# Altium PCB Eurocircuits4L.PcbDoc
Units mm, origin at the board's own origin, x right, y up, seen from the top; angles counter-clockwise.
Board outline 245.1 x 203.6 mm, 4 copper layers (Top Layer, Internal Plane 1, Internal Plane 2, Bottom Layer), stack 1.57 mm thick; 131 components, 89 nets, 447 pads, 91 vias.
Unrouted connection lines stored in the file: 4.
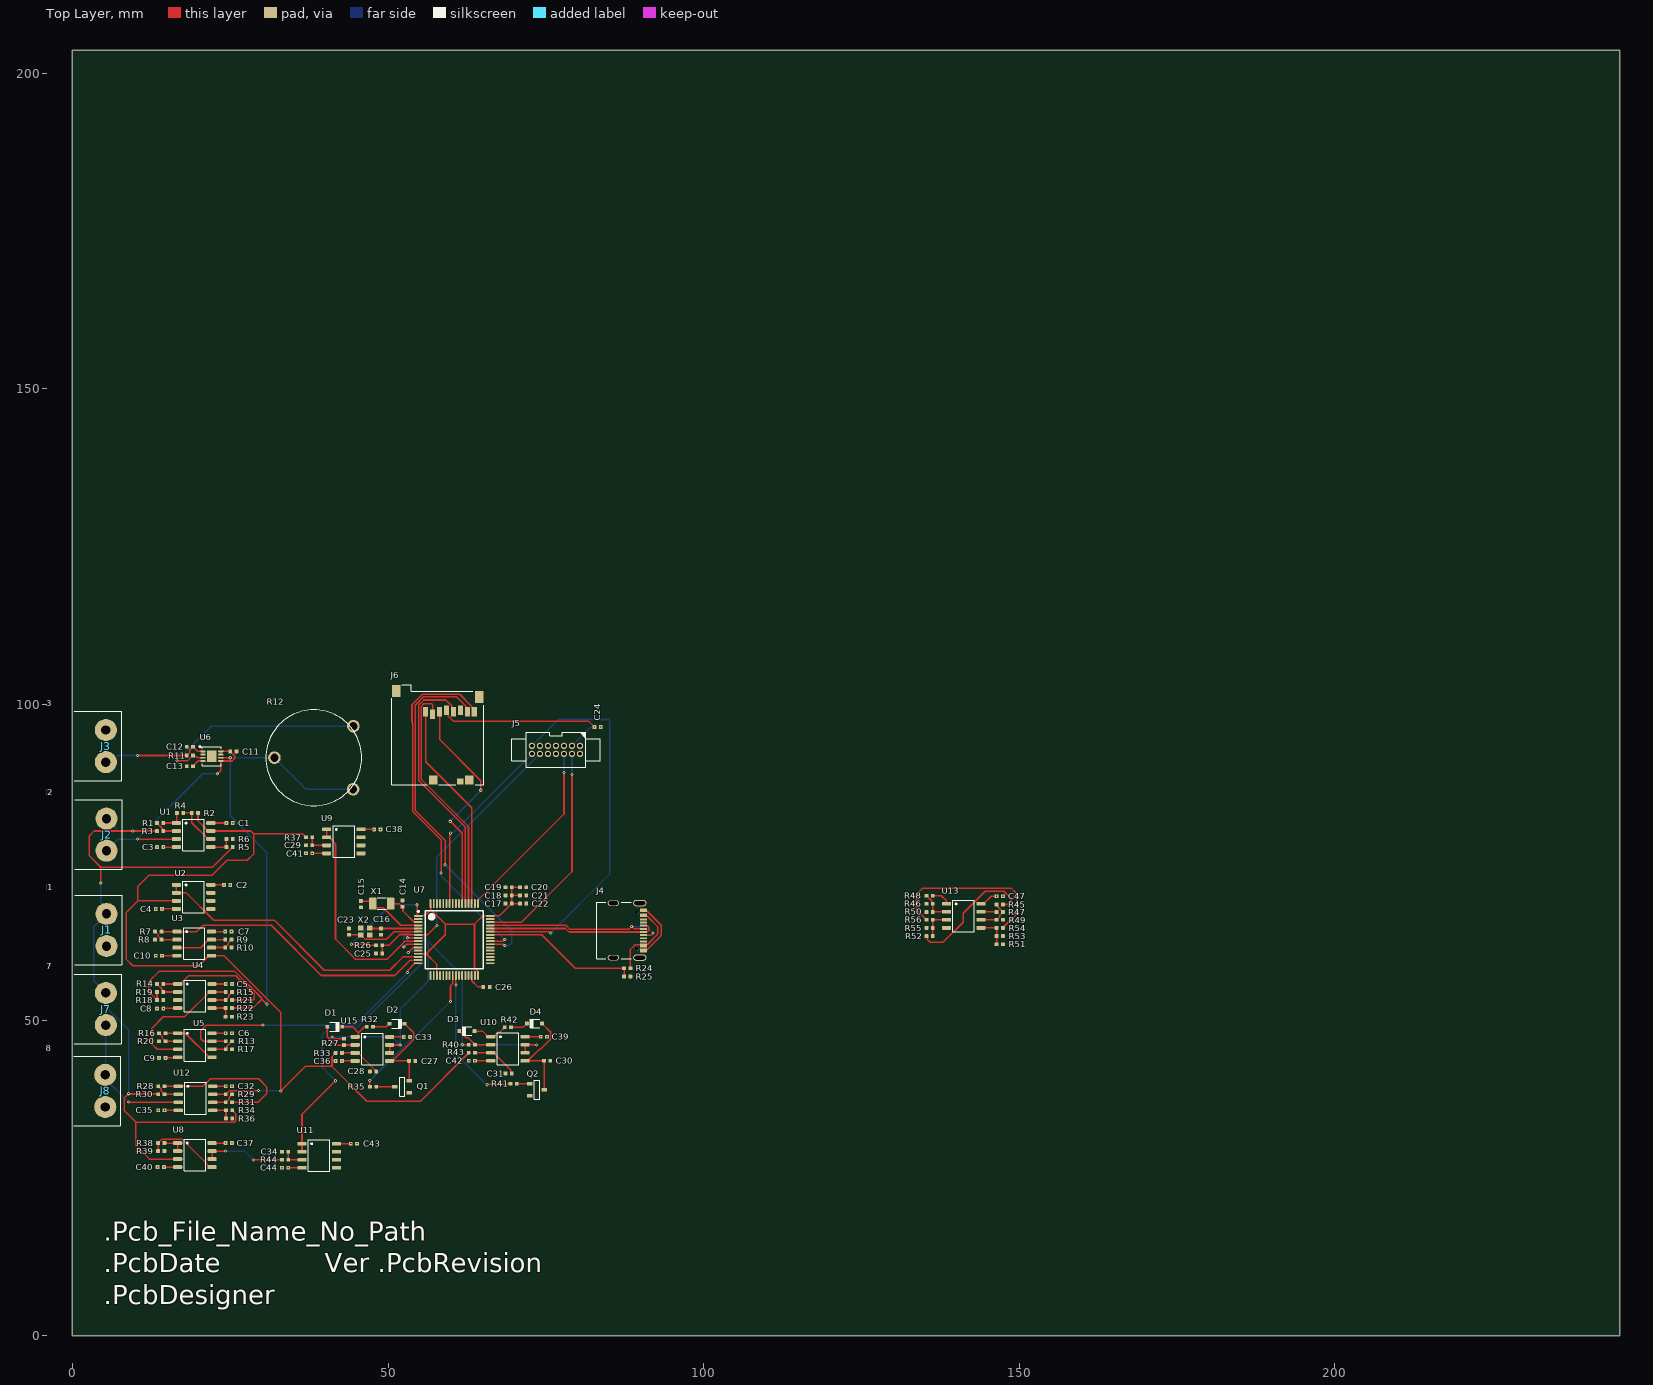
[diagram p0: Top Layer view]
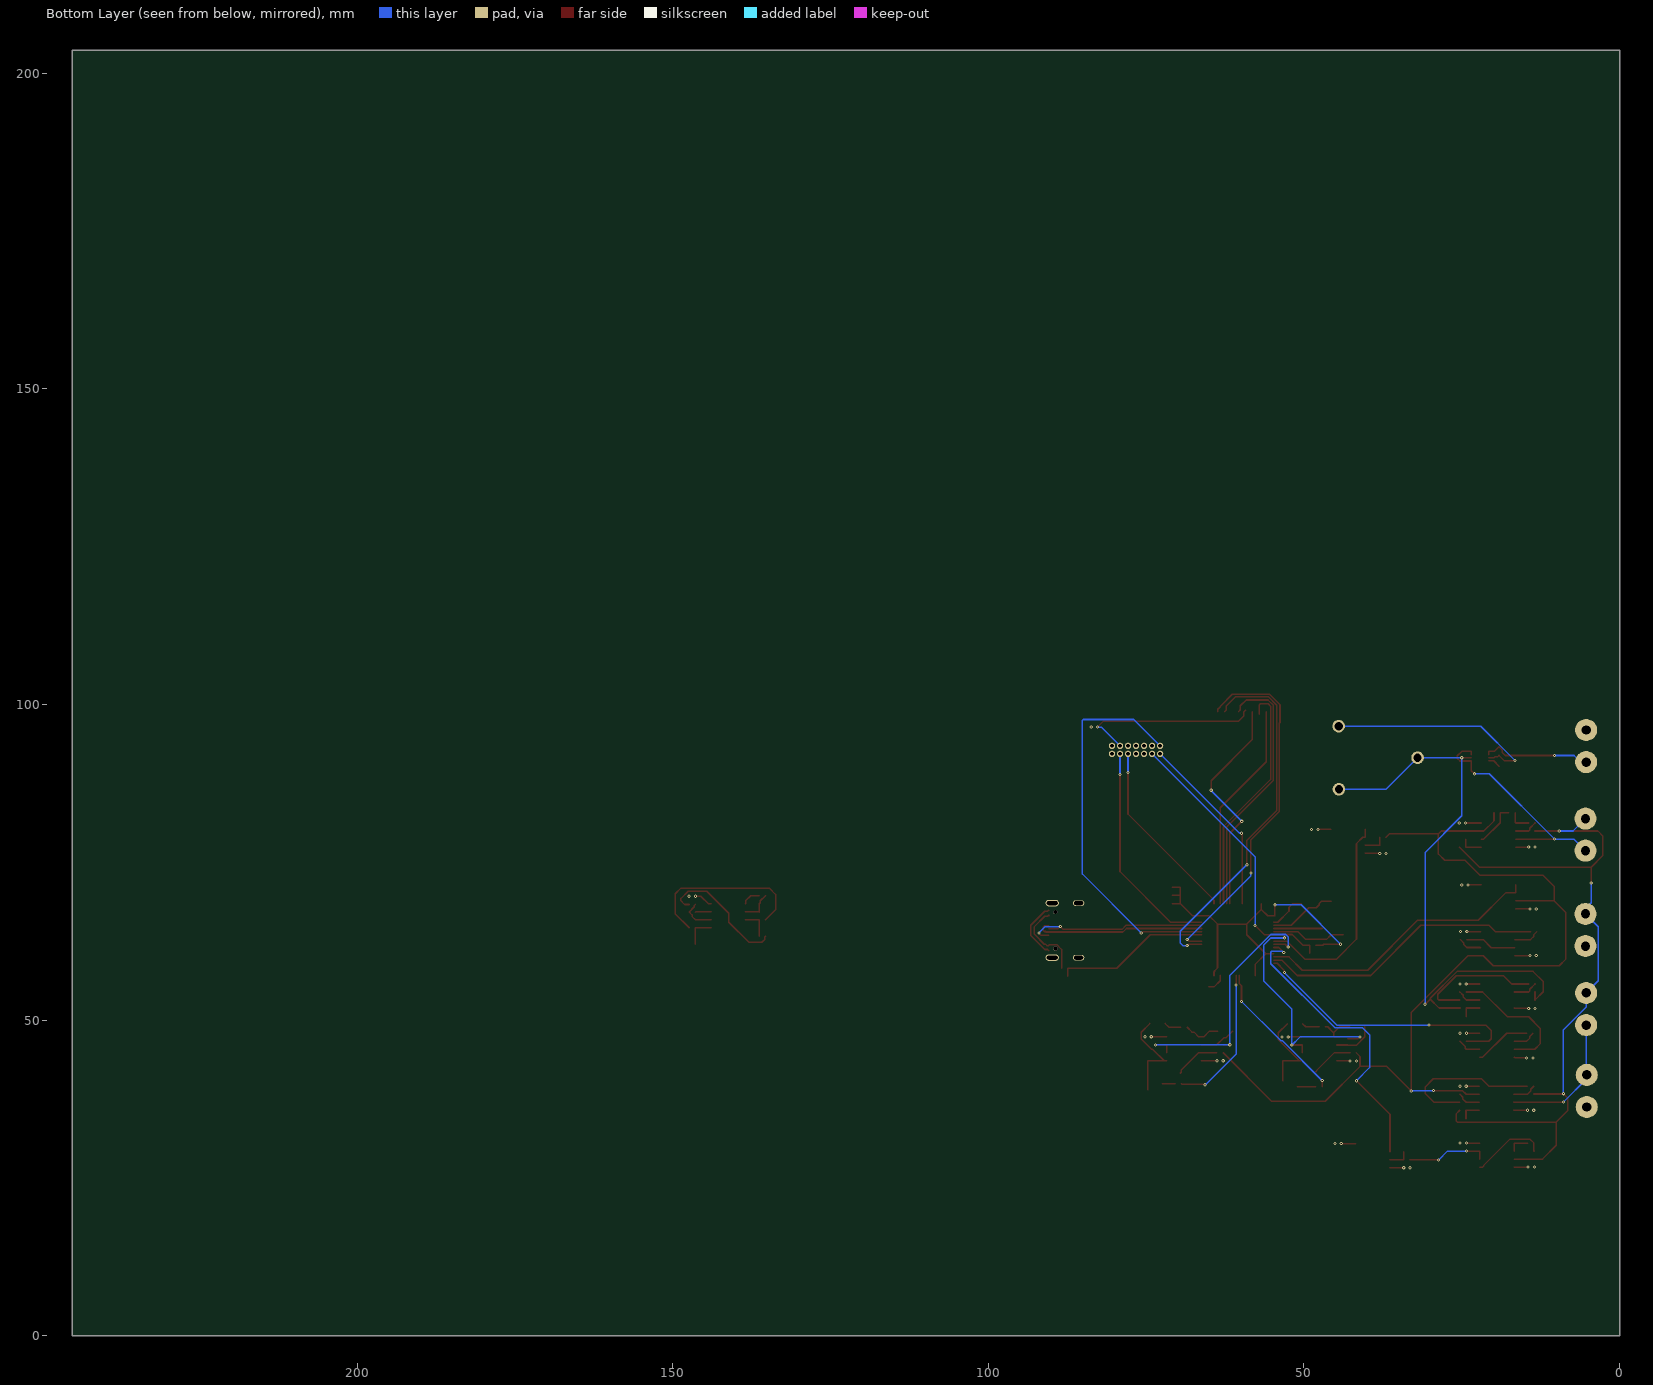
[diagram p1: Bottom Layer view, seen from below]
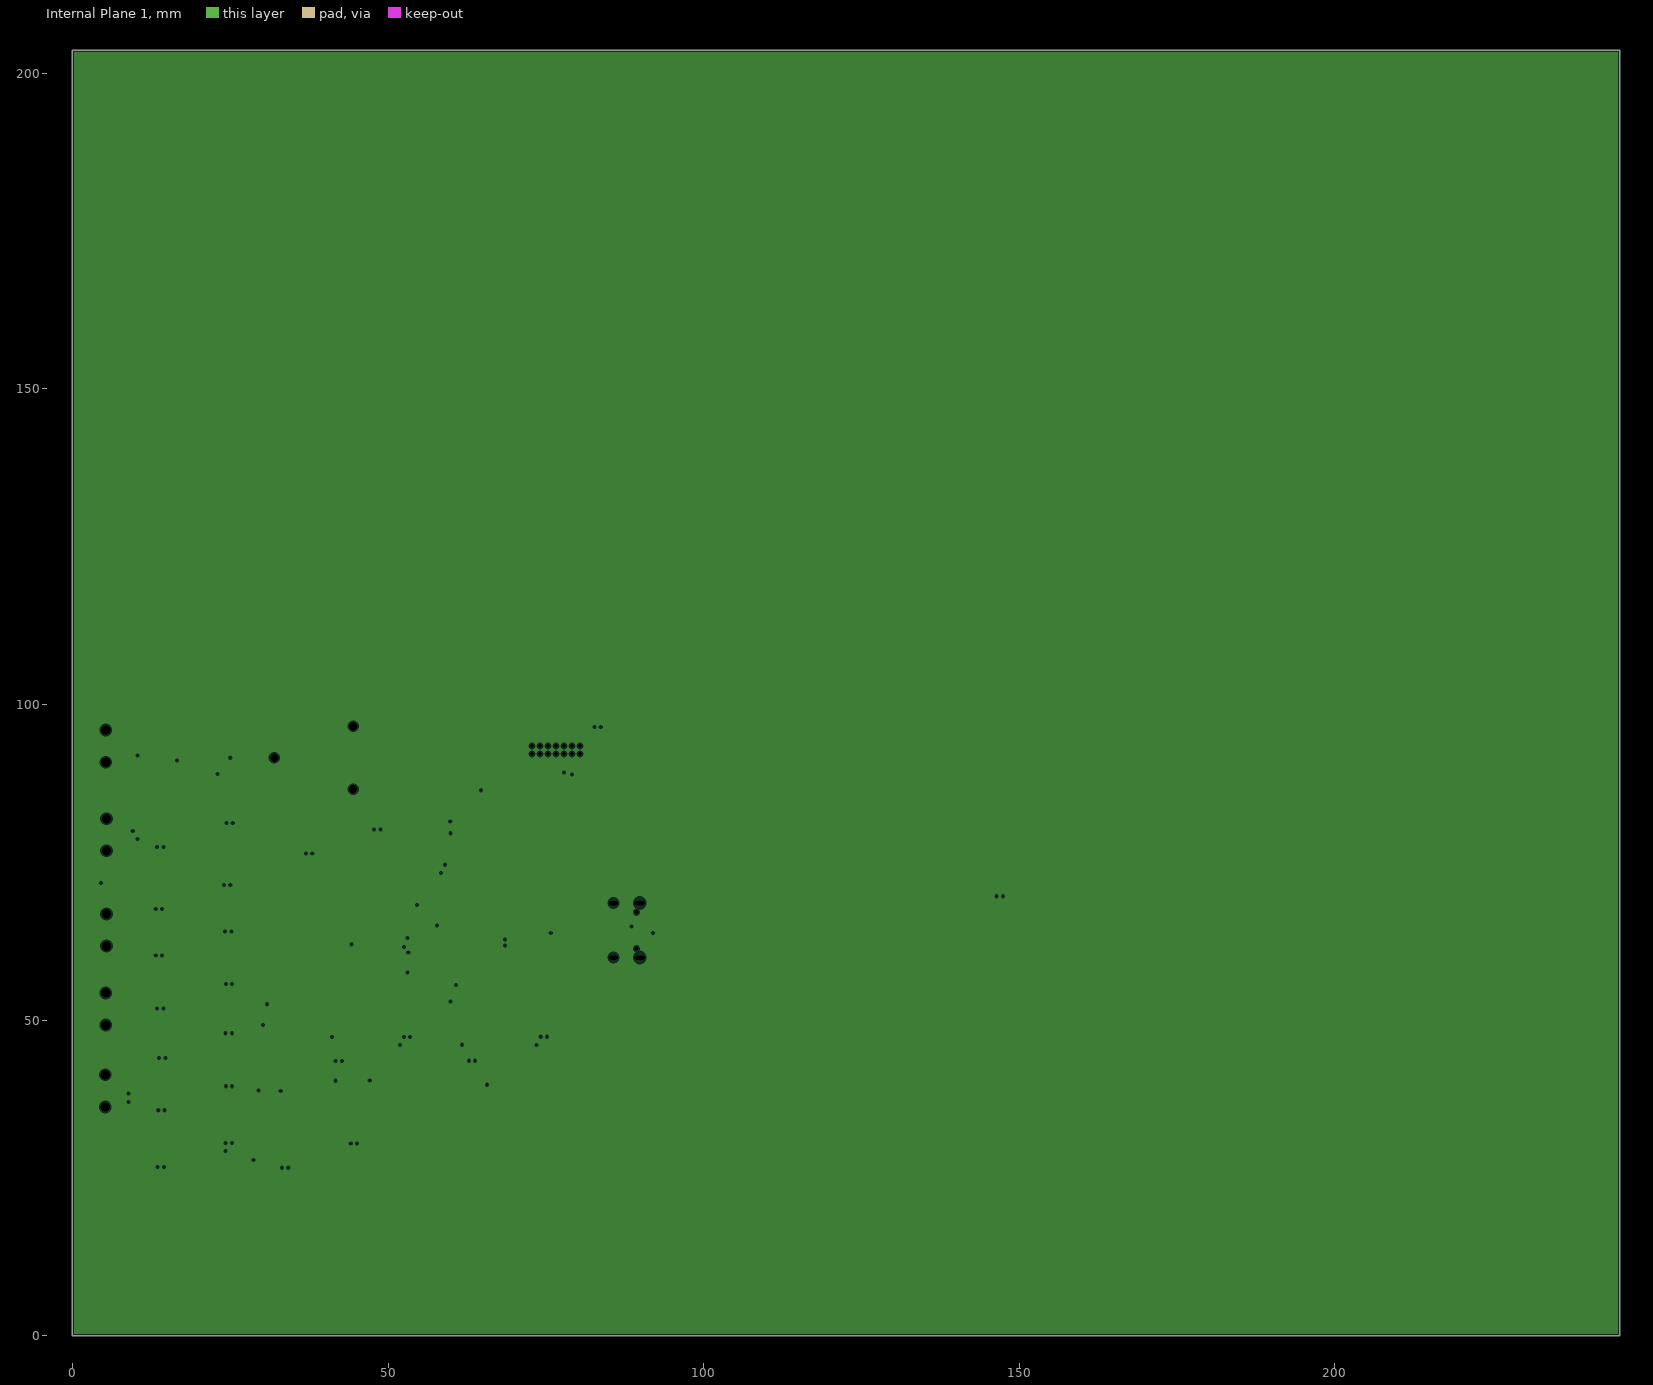
[diagram p2: Internal Plane 1, clearances drawn from the general rule]
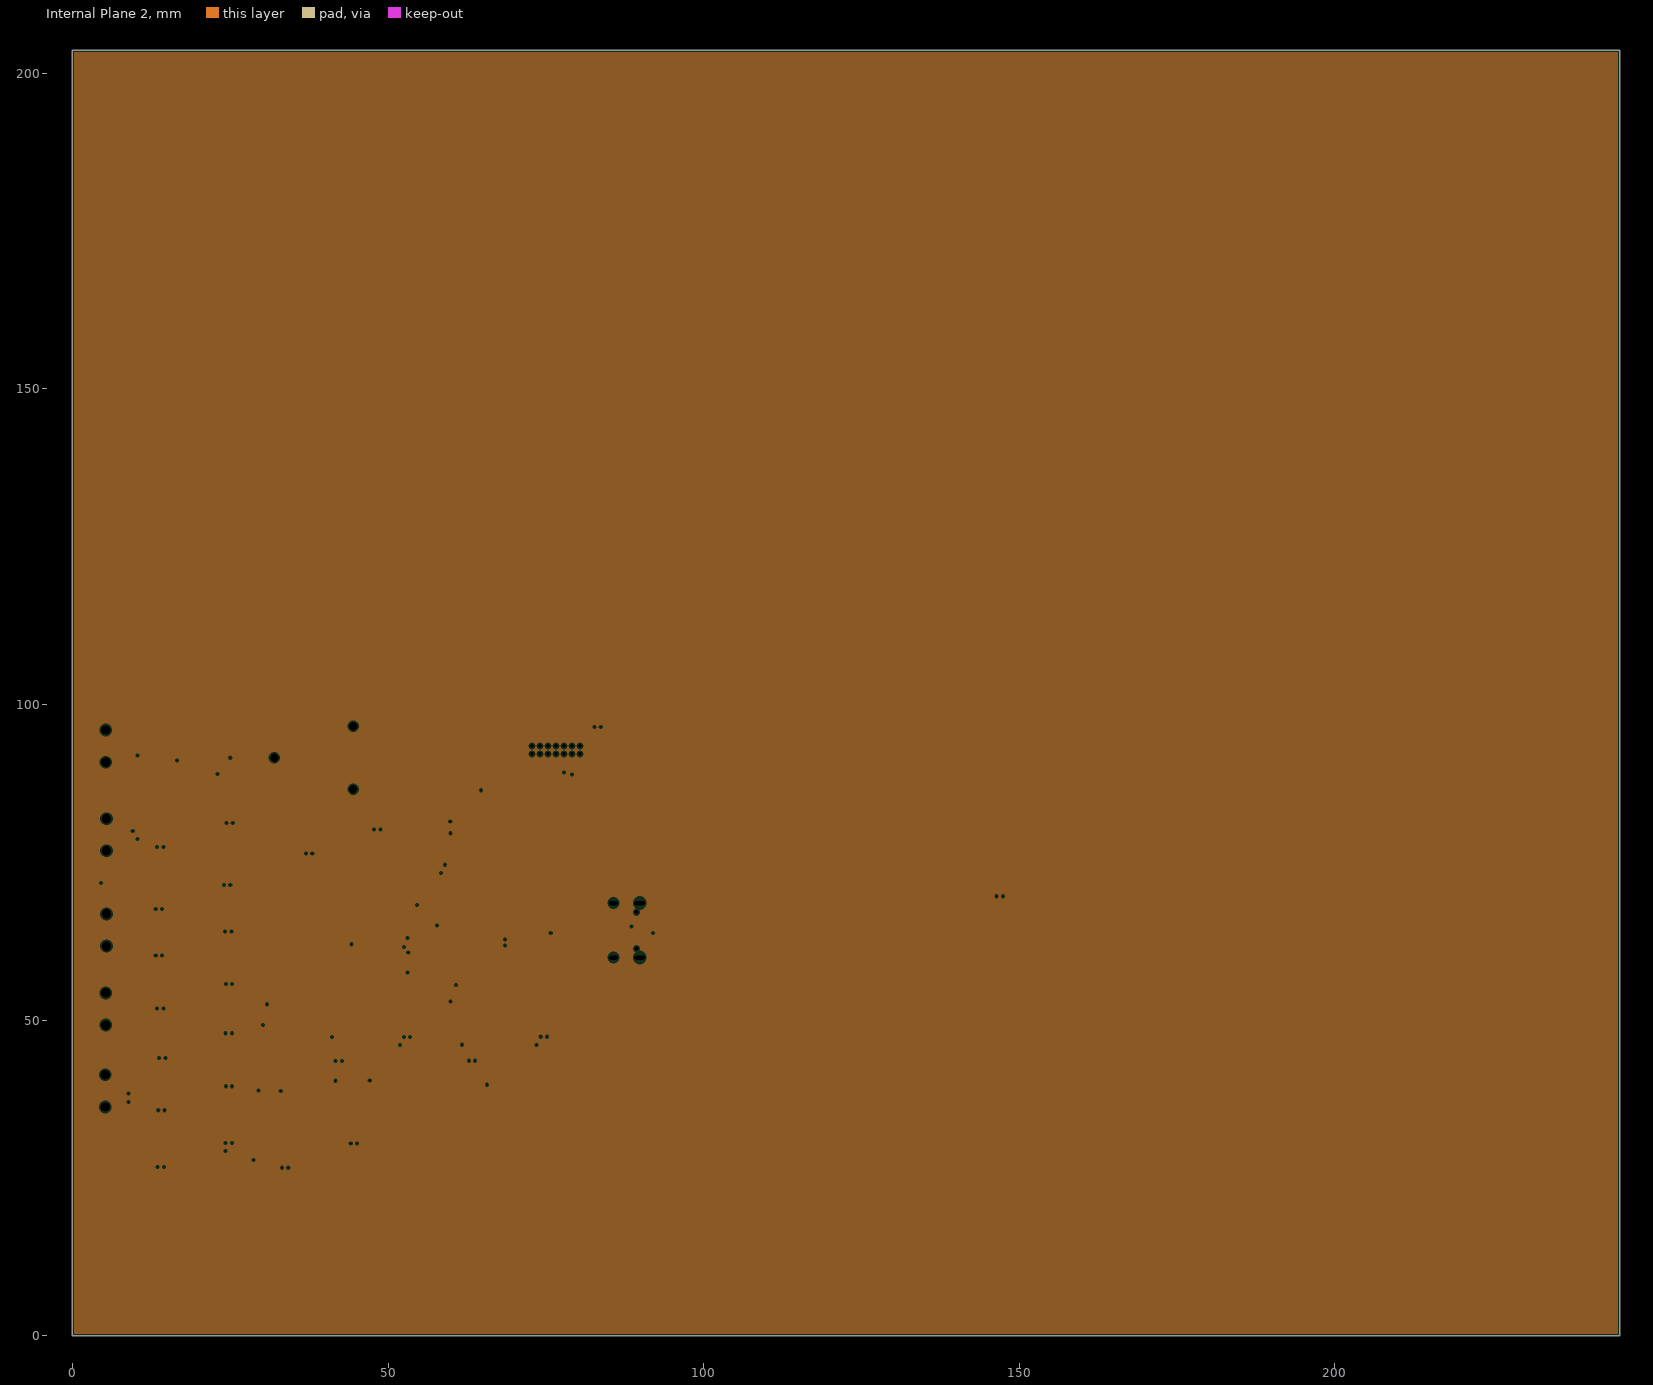
[diagram p3: Internal Plane 2, clearances drawn from the general rule]
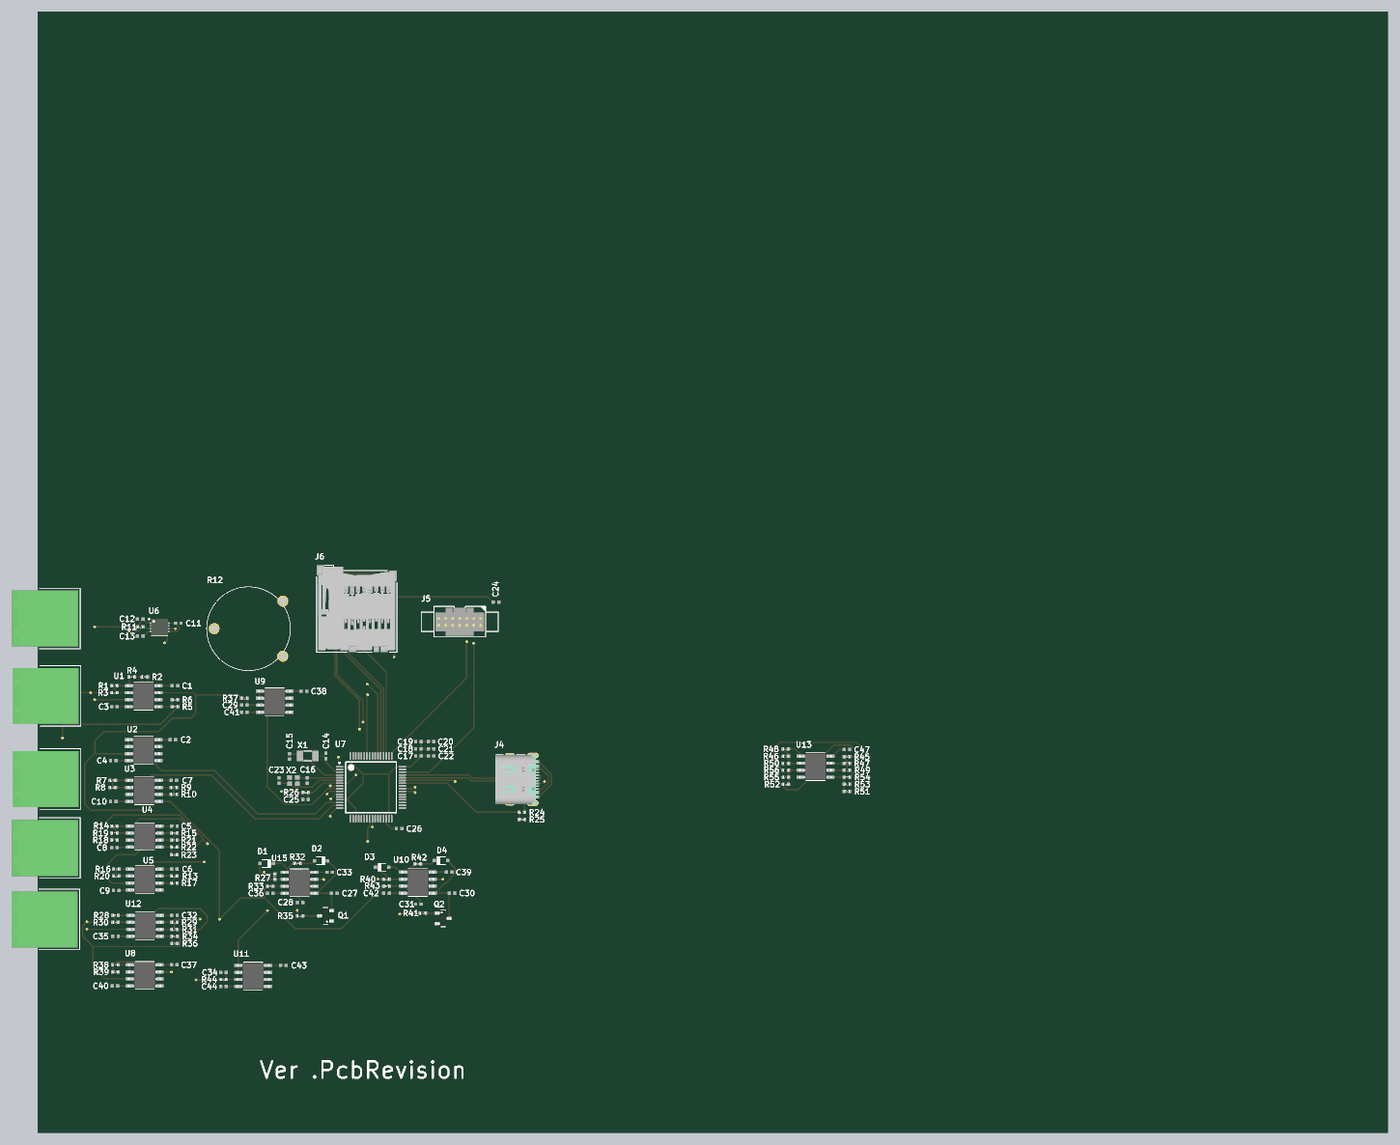
[diagram p4: 3D render of the assembled board from above, using the file's embedded part models]

## Layer stack, top to bottom
Top Solder: solder mask 0.01, Solder Resist, Dk 3.5
Top Layer: signal copper 0.035
Dielectric 1: prepreg 0.36, PR7826, Dk 4.32
Internal Plane 1: plane copper 0.035
Dielectric 3: core 0.71, FR-4, Dk 4.2
Internal Plane 2: plane copper 0.035
Dielectric 2: prepreg 0.36, PR7826, Dk 4.32
Bottom Layer: signal copper 0.035
Bottom Solder: solder mask 0.01, Solder Resist, Dk 3.5

## Board outline
0,0 0,203.6 245.1,203.6 245.1,0

## Design rules (kind name [scope] priority, off if disabled: settings)
AcuteAngle [All] p1 off: minimum=9.00000000000000E+0001 checktracksonly=TRUE
AssemblyTestPointUsage [All] p1 off:
AssemblyTestpoint [All] p1 off: testpointundercomponent=TRUE minsize=1.016 maxsize=2.54 preferedsize=1.524 minholesize=0 maxholesize=1.016 preferedholesize=0.813 testpointgrid=0.025 usegrid=TRUE gridtolerance=0 allowsidetop=TRUE allowsidebottom=TRUE
BoardOutlineClearance [All] p1 off: gap=0.25 ignorepadtopadclearanceinfootprint=FALSE
Clearance [All] p1: gap=0.15 ignorepadtopadclearanceinfootprint=FALSE except(0: Arc-Hole Track-Hole SMDPad-Hole THPad-Hole Via-Hole Fill-Hole Poly-Hole Region-Hole Text-Hole)
ComponentClearance [All] p1 off: gap=0.25 collisioncheckmode=3 verticalgap=0.25 showdistances=FALSE
DiffPairsRouting [All] p1 off: maxlimit=0.254 minlimit=0.254 mostfreqgap=0.254 toplayer_minwidth=0.381 toplayer_maxwidth=0.381 toplayer_prefwidth=0.381 bottomlayer_minwidth=0.381 bottomlayer_maxwidth=0.381 bottomlayer_prefwidth=0.381 maxuncoupledlength=12.7
FabricationTestPointUsage [All] p1 off: valid=0 allowmultiple=FALSE
FabricationTestpoint [All] p1 off: side=3 testpointundercomponent=TRUE minsize=1.016 maxsize=2.54 preferedsize=1.524 minholesize=0 maxholesize=1.016 preferedholesize=0.813 testpointgrid=0.025 allowsidetop=TRUE allowsidebottom=TRUE usegrid=TRUE gridtolerance=0
FanoutControl Fanout_BGA [IsBGA] p1 off: bgadir=Out bgaviamode=Centered fanoutstyle=Auto fanoutdirection=Alternating viagrid=0.025 // Fanout_BGA (Default Rule)
FanoutControl Fanout_LCC [IsLCC] p2 off: bgadir=Out bgaviamode=Centered fanoutstyle=Auto fanoutdirection=Alternating viagrid=0.025 // Fanout_LCC (Default Rule)
FanoutControl Fanout_SOIC [IsSOIC] p3 off: bgadir=Out bgaviamode=Centered fanoutstyle=Auto fanoutdirection=Alternating viagrid=0.025 // Fanout_SOIC (Default Rule)
FanoutControl Fanout_Small [(CompPinCount < 5)] p4 off: bgadir=Out bgaviamode=Centered fanoutstyle=Auto fanoutdirection=OutThenIn viagrid=0.025 // Fanout_Small (Default Rule)
FanoutControl Fanout_Default [All] p5 off: bgadir=Out bgaviamode=Centered fanoutstyle=Auto fanoutdirection=Alternating viagrid=0.025 // Fanout_Default (Default Rule)
Height [All] p1 off: minheight=0 maxheight=25.4 prefheight=12.7
HoleSize [All] p1: absolutevalues=TRUE maxlimit=5 minlimit=0.15 maxpercent=80.000 minpercent=20.000
HoleToHoleClearance [All] p1 off: gap=0.25 allowstackedmicrovias=TRUE
LayerPairs [All] p1 off: enforce=TRUE
MinimumAnnularRing [All] p1 off: minimumring=0.175
MinimumSolderMaskSliver [All] p1 off: minsoldermaskwidth=0
NetAntennae [All] p1 off: netantennaetolerance=0
PasteMaskExpansion [All] p1 off: expansion=0
PlaneClearance [All] p1: clearance=0.25
PlaneConnect [All] p1: planeconnectstyle=Direct reliefexpansion=0.5 reliefentries=4 reliefconductorwidth=0.25 reliefairgap=0.25
PolygonConnect [All] p1: connectstyle=Direct reliefconductorwidth=0.25 reliefentries=4 polygonreliefangle="90 Angle" airgapwidth=0.25
RoutingCorners [All] p1 off: cornerstyle=45-Degree minsetback=2.5 maxsetback=2.5
RoutingLayers [All] p1 off: top layer_v5=TRUE bottom layer_v5=TRUE
RoutingPriority [All] p1 off: routingpriority=0
RoutingTopology [All] p1 off: topology=Shortest
RoutingVias [All] p1: holewidth=0.25 width=0.6 viastyle="Through Hole" minholewidth=0.15 minwidth=0.5 maxholewidth=0.9 maxwidth=1.5 useviatemplates=TRUE viatemplateguid#1={6E875701-A1CC-42E3-88A2-D4F7C724CCEE} viatemplatename#1=v50h15m0mx0
SilkToBoardRegionClearance [All] p1 off:
SilkToSilkClearance [All] p1 off: silktosilkclearance=0
SilkToSolderMaskClearance [IsPad] p1 off: minsilkscreentomaskgap=0 clearancetoexposedcopper=TRUE
SolderMaskExpansion [All] p1: expansion=0 istentingtop=FALSE
Width [All] p1: maxlimit=4 minlimit=0.15 preferedwidth=0.25
3 further rules are at their usual default settings.

## Classes and differential pairs
component class Batterie: C47 R45 R46 R47 R48 R49 R50 R51 R52 R53 R54 R55 R56 U13
component class PROC: C14 C15 C16 C17 C18 C19 C20 C21 C22 C23 C24 C25 C26 J4 J5 J6 R24 R25 R26 U7 X1 X2
component class SLOW: C27 C28 C29 C30 C31 C32 C33 C34 C35 C36 C37 C38 C39 C40 C41 C42 C47 D1 D2 D3 D4 J7 J8 Q1 Q2 R27 R28 R29 R30 R31 R32 R33 R34 R35 R36 R37 R38 R39 R40 R41 R42 R43 R44 U8 U9 U10 U11 U12 U15
component class FAST: C1 C2 C3 C4 C5 C6 C7 C8 C9 C10 C11 C12 C13 J1 J2 J3 R1 R2 R3 R4 R5 R6 R7 R8 R9 R10 R11 R12 R13 R14 R15 R16 R17 R18 R19 R20 R21 R22 R23 U1 U2 U3 U4 U5 U6

## Components (designator, comment, footprint, x,y, rotation, side; value= is the part's Value field where it differs from the comment)
C1 "1u" "CAPACITOR 1005 REFLOW" 24.9,81.205 r0 top
C2 "1u" "CAPACITOR 1005 REFLOW" 24.5,71.405 r0 top
C3 "1u" "CAPACITOR 1005 REFLOW" 13.9,77.395 r0 top
C4 "1u" "CAPACITOR 1005 REFLOW" 13.7,67.595 r0 top
C5 "1u" "CAPACITOR 1005 REFLOW" 24.8,55.705 r0 top
C6 "1u" "CAPACITOR 1005 REFLOW" 24.776,47.905 r0 top
C7 "1u" "CAPACITOR 1005 REFLOW" 24.7,64 r0 top
C8 "1u" "CAPACITOR 1005 REFLOW" 13.9,51.8 r0 top
C9 "1u" "CAPACITOR 1005 REFLOW" 14.23,44 r0 top
C10 "1u" "CAPACITOR 1005 REFLOW" 13.7,60.195 r0 top
C11 "4.7u" "CAPACITOR 1005 REFLOW" 25.5,92.55 r0 top
C12 "4.7u" "CAPACITOR 1005 REFLOW" 18.6,93.3 r180 top
C13 "1n" "CAPACITOR 1005 REFLOW" 18.6,90.2 r180 top
C14 "18p" "CAPACITOR 1005 REFLOW" 52.298,68.445 r270 top
C15 "18p" "CAPACITOR 1005 REFLOW" 45.698,68.345 r90 top
C16 "18p" "CAPACITOR 1005 REFLOW" 48.898,63.995 r90 top
C17 "100n" "CAPACITOR 1005 REFLOW" 69.098,68.445 r180 top
C18 "100n" "CAPACITOR 1005 REFLOW" 69.098,69.745 r180 top
C19 "100n" "CAPACITOR 1005 REFLOW" 69.098,71.045 r180 top
C20 "100n" "CAPACITOR 1005 REFLOW" 71.398,71.045 r0 top
C21 "100n" "CAPACITOR 1005 REFLOW" 71.398,69.745 r0 top
C22 "100n" "CAPACITOR 1005 REFLOW" 71.398,68.445 r0 top
C23 "18p" "CAPACITOR 1005 REFLOW" 43.798,63.995 r90 top
C24 "100n" "CAPACITOR 1005 REFLOW" 83.2,96.4 r0 top
C25 "18p" "CAPACITOR 1005 REFLOW" 48.598,60.545 r180 top
C26 "100n" "CAPACITOR 1005 REFLOW" 65.598,55.245 r0 top
C27 "4.7u" "CAPACITOR 1005 REFLOW" 53.822,43.515 r0 top
C28 "33n" "CAPACITOR 1005 REFLOW" 47.623,41.82 r180 top
C29 "3,3u" "CAPACITOR 1005 REFLOW" 37.5,77.7 r180 top
C30 "4.7u" "CAPACITOR 1005 REFLOW" 75.198,43.54 r0 top
C31 "33n" "CAPACITOR 1005 REFLOW" 69.098,41.545 r180 top
C32 "1u" "CAPACITOR 1005 REFLOW" 24.8,39.505 r0 top
C33 "1u" "CAPACITOR 1005 REFLOW" 52.998,47.325 r0 top
C34 "3,3u" "CAPACITOR 1005 REFLOW" 33.7,29.14 r180 top
C35 "1u" "CAPACITOR 1005 REFLOW" 14.1,35.7 r0 top
C36 "1u" "CAPACITOR 1005 REFLOW" 42.195,43.515 r0 top
C37 "1u" "CAPACITOR 1005 REFLOW" 24.771,30.505 r0 top
C38 "1u" "CAPACITOR 1005 REFLOW" 48.3,80.2 r0 top
C39 "1u" "CAPACITOR 1005 REFLOW" 74.698,47.35 r0 top
C40 "1u" "CAPACITOR 1005 REFLOW" 14,26.7 r0 top
C41 "1u" "CAPACITOR 1005 REFLOW" 37.5,76.4 r0 top
C42 "1u" "CAPACITOR 1005 REFLOW" 63.298,43.54 r0 top
C43 "1u" "CAPACITOR 1005 REFLOW" 44.6,30.41 r0 top
C44 "1u" "CAPACITOR 1005 REFLOW" 33.7,26.6 r0 top
C47 "1u" "CAPACITOR 1005 REFLOW" 146.9,69.6 r0 top
D1 "*" "DIODE SOD323 REFLOW" 41.563,48.92 r180 top
D2 "*" "DIODE SOD323 REFLOW" 51.423,49.42 r180 top
D3 "*" "DIODE SOD323 REFLOW" 62.498,48.245 r0 top
D4 "*" "DIODE SOD323 REFLOW" 73.198,49.445 r0 top
J1 "*" "WE 691312510002" 5.4,64.26 r90 top
J2 "*" "WE 691312510002" 5.4,79.36 r90 top
J3 "*" "WE 691312510002" 5.3,93.4 r90 top
J4 "12402012E212A" "USB-C-SMD Amphenol 12402012E212A" 85.7,64.196 r270 top
J5 "STlink-14pin-1.27mm" FTSH-107-01-S-D-K 76.6,92.799 r180 top
J6 "47352-1001" "SD MICRO MOLEX 47352-1001" 57.9,95.2 r180 top
J7 "*" "WE 691312510002" 5.3,51.74 r90 top
J8 "*" "WE 691312510002" 5.2,38.76 r90 top
Q1 "*" "SOT23 P0.95 C1.6x3.0 H1.3" 52.223,39.42 r180 top
Q2 "*" "SOT23 P0.95 C1.6x3.0 H1.3" 73.598,38.945 r0 top
R1 "20k" "RESISTOR 1005 REFLOW" 13.9,81.205 r0 top
R2 "10k" "RESISTOR 1005 REFLOW" 19.4,82.8 r0 top
R3 "10k" "RESISTOR 1005 REFLOW" 13.9,79.935 r0 top
R4 "10k" "RESISTOR 1005 REFLOW" 17.054,82.8 r0 top
R5 "10k" "RESISTOR 1005 REFLOW" 24.9,77.395 r180 top
R6 "10k" "RESISTOR 1005 REFLOW" 24.9,78.665 r180 top
R7 "100k" "RESISTOR 1005 REFLOW" 13.6,64.005 r0 top
R8 "10k" "RESISTOR 1005 REFLOW" 13.6,62.735 r0 top
R9 "100k" "RESISTOR 1005 REFLOW" 24.7,62.735 r180 top
R10 "10k" "RESISTOR 1005 REFLOW" 24.7,61.5 r180 top
R11 "10k" "RESISTOR 1005 REFLOW" 18.6,91.9 r180 top
R12 "*" "Trimmer PIHER PT15" 38.25,91.55 r90 top
R13 "100k" "RESISTOR 1005 REFLOW" 24.776,46.635 r0 top
R14 "20k" "RESISTOR 1005 REFLOW" 13.9,55.705 r180 top
R15 "10k" "RESISTOR 1005 REFLOW" 24.8,54.435 r0 top
R16 "100k" "RESISTOR 1005 REFLOW" 14.23,47.905 r180 top
R17 "10k" "RESISTOR 1005 REFLOW" 24.776,45.365 r0 top
R18 "2" "RESISTOR 1005 REFLOW" 13.9,53.165 r180 top
R19 "10k" "RESISTOR 1005 REFLOW" 13.9,54.435 r180 top
R20 "10k" "RESISTOR 1005 REFLOW" 14.23,46.635 r180 top
R21 "10k" "RESISTOR 1005 REFLOW" 24.8,53.165 r0 top
R22 "10k" "RESISTOR 1005 REFLOW" 24.771,51.895 r0 top
R23 "10k" "RESISTOR 1005 REFLOW" 24.771,50.5 r0 top
R24 "22k" "RESISTOR 1005 REFLOW" 87.9,58.2 r180 top
R25 "33k" "RESISTOR 1005 REFLOW" 87.9,56.9 r180 top
R26 "22k" "RESISTOR 1005 REFLOW" 48.598,61.845 r180 top
R27 "10k" "RESISTOR 1005 REFLOW" 43.023,46.52 r270 top
R28 "150k" "RESISTOR 1005 REFLOW" 14.1,39.505 r0 top
R29 "110k" "RESISTOR 1005 REFLOW" 24.8,38.235 r180 top
R30 "12k" "RESISTOR 1005 REFLOW" 14.1,38.235 r0 top
R31 "10k" "RESISTOR 1005 REFLOW" 24.8,36.965 r180 top
R32 "100" "RESISTOR 1005 REFLOW" 47.123,48.92 r180 top
R33 "10k" "RESISTOR 1005 REFLOW" 42.195,44.785 r180 top
R34 "10k" "RESISTOR 1005 REFLOW" 24.829,35.695 r180 top
R35 "1k" "RESISTOR 1005 REFLOW" 47.623,39.42 r180 top
R36 "110k" "RESISTOR 1005 REFLOW" 24.829,34.4 r180 top
R37 "33k" "RESISTOR 1005 REFLOW" 37.5,78.935 r180 top
R38 "33k" "RESISTOR 1005 REFLOW" 14.071,30.505 r180 top
R39 "82k" "RESISTOR 1005 REFLOW" 14.071,29.235 r180 top
R40 "10k" "RESISTOR 1005 REFLOW" 63.298,46.08 r0 top
R41 "1k" "RESISTOR 1005 REFLOW" 69.898,39.895 r0 top
R42 "100" "RESISTOR 1005 REFLOW" 68.998,48.845 r180 top
R43 "10k" "RESISTOR 1005 REFLOW" 63.298,44.81 r180 top
R44 "33k" "RESISTOR 1005 REFLOW" 33.7,27.87 r180 top
R45 "1M" "RESISTOR 1005 REFLOW" 146.9,68.3 r0 top
R46 "100k" "RESISTOR 1005 REFLOW" 135.8,68.405 r180 top
R47 "9,1M" "RESISTOR 1005 REFLOW" 146.9,67.1 r0 top
R48 "910k" "RESISTOR 1005 REFLOW" 135.8,69.7 r180 top
R49 "649k" "RESISTOR 1005 REFLOW" 146.9,65.865 r180 top
R50 "41,2k" "RESISTOR 1005 REFLOW" 135.8,67.1 r0 top
R51 "1M" "RESISTOR 1005 REFLOW" 146.9,62 r0 top
R52 "100k" "RESISTOR 1005 REFLOW" 135.8,63.3 r180 top
R53 "5,76M" "RESISTOR 1005 REFLOW" 146.9,63.3 r180 top
R54 "680k" "RESISTOR 1005 REFLOW" 146.9,64.595 r180 top
R55 "93,1k" "RESISTOR 1005 REFLOW" 135.8,64.595 r0 top
R56 "82k" "RESISTOR 1005 REFLOW" 135.8,65.865 r0 top
U1 "*" "SO8 P1.27 C4.0X5.0 H1.75" 19.2,79.3 r0 top
U2 "*" "SO8 P1.27 C4.0X5.0 H1.75" 19.2,69.5 r0 top
U3 "*" "SO8 P1.27 C4.0X5.0 H1.75" 19.3,62.1 r0 top
U4 "*" "SO8 P1.27 C4.0X5.0 H1.75" 19.4,53.8 r0 top
U5 "*" "SO8 P1.27 C4.0X5.0 H1.75" 19.405,46 r0 top
U6 "ADM7170ACPZ-3.3-R7" "LFCSP8 P0.5 C3.0x2.8 H1.0" 22.1,91.8 r0 top
U7 "STM32U595RJT6" TSQFP50P1200X1200X160-64N 60.498,62.745 r0 top
U8 "*" "SO8 P1.27 C4.0X5.0 H1.75" 19.4,28.6 r0 top
U9 "*" "SO8 P1.27 C4.0X5.0 H1.75" 43,78.3 r0 top
U10 "*" "SO8 P1.27 C4.0X5.0 H1.75" 68.998,45.445 r0 top
U11 "*" "SO8 P1.27 C4.0X5.0 H1.75" 39.099,28.505 r0 top
U12 "*" "SO8 P1.27 C4.0X5.0 H1.75" 19.5,37.6 r0 top
U13 "*" "SO8 P1.27 C4.0X5.0 H1.75" 141.199,66.5 r0 top
U15 "*" "SO8 P1.27 C4.0X5.0 H1.75" 47.523,45.42 r0 top
X1 "*" "Crystal C3.2x1.5 Abracon ABS07" 48.998,68.445 r180 top
X2 "*" "Crystal C2.0x1.6 Kyocera CX2016DB" 46.398,63.995 r0 top

## Footprints (in the part's own frame and the unit in brackets; to place one, negate y for a bottom-side part, rotate by r counter-clockwise, add the part's x,y. Pads: shape width x height; smd on the part's side, far side on the other; paste and mask are expansions set on the pad)
"CAPACITOR 1005 REFLOW" [mm] "Capacitor SMD 1.0x0.5mm (0402-imperial)"
  rrect25% 0.6x0.6 smd: 1(-0.5,0) 2(0.5,0)
  body extent -0.5,-0.25 0.5,0.25, height 0.5
"Crystal C2.0x1.6 Kyocera CX2016DB" [mm] "Crystal C2.0x1.6 Kyocera CX2016DB, Height 0.4mm"
  rect 0.9x0.8 smd: 1(-0.7,-0.55) 2(0.7,-0.55) 3(0.7,0.55) 4(-0.7,0.55)
  body extent -1,-0.8 1,0.8, height 0.4
"Crystal C3.2x1.5 Abracon ABS07" [mm] "Crystal C3.2x1.5 Abracon ABS07"
  rrect25% 1.2x1.9 smd: 1(-1.4,0) 2(1.4,0)
  silkscreen extent -0.7,-0.9 0.7,0.9, body extent -1.6,-0.8 1.6,0.8, height 0.9
"DIODE SOD323 REFLOW" [mm] "DIODE SMD SOD323, 2-Leads, Body 1.8x1.40mm"
  rrect25% 0.6x0.6 smd: 1(-1.2,0) 2(1.2,0)
  silkscreen extent -0.78,-0.7 0.8,0.7, body extent -1.3,-0.7 1.3,0.7, height 1.21
FTSH-107-01-S-D-K [mm]
  round 1 hole 0.6: 1(-3.81,-0.635) 2(-3.81,0.635) 3(-2.54,-0.635) 4(-2.54,0.635) 5(-1.27,-0.635) 6(-1.27,0.635) 7(0,-0.635) 8(0,0.635) 9(1.27,-0.635) 10(1.27,0.635) 11(2.54,-0.635) 12(2.54,0.635) 13(3.81,-0.635) 14(3.81,0.635)
  silkscreen extent -7,-2.8 7,2.75, body extent -4.44,-2.54 4.45,2.54, height 5.71
"LFCSP8 P0.5 C3.0x2.8 H1.0" [mm] "LFCSP8"
  rect 1.5x1.8 smd: 0(0,0)
  rrect50% 0.8x0.3 smd: 1(-1.4,0.75) 2(-1.4,0.25) 3(-1.4,-0.25) 4(-1.4,-0.75) 5(1.4,-0.75) 6(1.4,-0.25) 7(1.4,0.25) 8(1.4,0.75)
  silkscreen extent -2,-1.5 1.5,1.6, body extent -1.5,-1.5 1.5,1.5, height 0.79
"RESISTOR 1005 REFLOW" [mm] "Resistor SMD 1.0x0.5mm (0402-imperial)"
  rrect25% 0.6x0.6 smd: 1(-0.5,0) 2(0.5,0)
  body extent -0.5,-0.25 0.5,0.25, height 0.35
"SD MICRO MOLEX 47352-1001" [mm] "SD MICRO MOLEX 47352-1001"
  rect 1.4x1.9 smd: 0(-6.55,-5.95) 0(6.6,-6.95)
  rect 1.3x1.4 smd: 0(-4.95,7.2) 0(0.75,7.2)
  rect 0.8x1.5 smd: 1(1.94,-3.66) 2(0.84,-3.26) 3(-0.26,-3.66) 4(-1.36,-3.86) 5(-2.46,-3.66) 6(-3.56,-3.86) 7(-4.66,-3.66) 8(-5.76,-3.66)
  rect 1x0.95 smd: 9(-3.56,7.425)
  silkscreen extent -7.3,-7.9 7.3,7.9, body extent -7.05,-7.64 7.05,7.56, height 1.89
"SO8 P1.27 C4.0X5.0 H1.75" [mm] "8-Pin Small Outline Integrated Circuit 1.27 mm Pitch, IPC Medium Density"
  rrect50% 1.45x0.6 smd: 1(-2.725,1.905) 2(-2.725,0.635) 3(-2.725,-0.635) 4(-2.725,-1.905) 5(2.725,-1.905) 6(2.725,-0.635) 7(2.725,0.635) 8(2.725,1.905)
  silkscreen extent -1.7,-2.5 1.7,2.5, body extent -3,-2.45 3,2.45, height 1.75
"SOT23 P0.95 C1.6x3.0 H1.3" [mm] "SOT23, 3-Leads, Body 1.6x3.0mm, Pitch 0.95mm, IPC Medium Density"
  rrect50% 0.9x0.6 smd: 1(-1.15,0.95) 2(-1.15,-0.95) 3(1.15,0)
  silkscreen extent -0.4,-1.5 0.4,1.5, body extent -1.4,-1.45 1.4,1.45, height 1.3
"Trimmer PIHER PT15" [mm] "Trimmer PIHER PT15 Diameter 15mm"
  round 2 hole 1.3: 1(-5,-6.218) 2(0,6.25) 3(5,-6.25)
  silkscreen extent -7.6,-7.6 7.6,7.6, body extent -7.5,-7.5 7.5,7.5, height 7.1
TSQFP50P1200X1200X160-64N [mm] "TSQFP, 64-Leads, Body 10,00x10,00mm, Pitch 0,50mm, IPC Medium Density"
  oval 1.4x0.3 smd: 1(-5.7,3.75) 2(-5.7,3.25) 3(-5.7,2.75) 4(-5.7,2.25) 5(-5.7,1.75) 6(-5.7,1.25) 7(-5.7,0.75) 8(-5.7,0.25) 9(-5.7,-0.25) 10(-5.7,-0.75) 11(-5.7,-1.25) 12(-5.7,-1.75) 13(-5.7,-2.25) 14(-5.7,-2.75) 15(-5.7,-3.25) 16(-5.7,-3.75) 33(5.7,-3.75) 34(5.7,-3.25) 35(5.7,-2.75) 36(5.7,-2.25) 37(5.7,-1.75) 38(5.7,-1.25) 39(5.7,-0.75) 40(5.7,-0.25) 41(5.7,0.25) 42(5.7,0.75) 43(5.7,1.25) 44(5.7,1.75) 45(5.7,2.25) 46(5.7,2.75) 47(5.7,3.25) 48(5.7,3.75)
  oval 0.3x1.4 smd: 17(-3.75,-5.7) 18(-3.25,-5.7) 19(-2.75,-5.7) 20(-2.25,-5.7) 21(-1.75,-5.7) 22(-1.25,-5.7) 23(-0.75,-5.7) 24(-0.25,-5.7) 25(0.25,-5.7) 26(0.75,-5.7) 27(1.25,-5.7) 28(1.75,-5.7) 29(2.25,-5.7) 30(2.75,-5.7) 31(3.25,-5.7) 32(3.75,-5.7) 49(3.75,5.7) 50(3.25,5.7) 51(2.75,5.7) 52(2.25,5.7) 53(1.75,5.7) 54(1.25,5.7) 55(0.75,5.7) 56(0.25,5.7) 57(-0.25,5.7) 58(-0.75,5.7) 59(-1.25,5.7) 60(-1.75,5.7) 61(-2.25,5.7) 62(-2.75,5.7) 63(-3.25,5.7) 64(-3.75,5.7)
  silkscreen extent -5.82,-4.6 4.6,4.6, body extent -5,-5 5,5, height 1.6
"USB-C-SMD Amphenol 12402012E212A" [mm] "USB-C (USB TYPE-C) USB 2.0 Prise Connecteur 24 (16+8 Factice) Positions Montage en surface, angle droit, trou traversant"
  rect 0.6x1.14 smd: A1_B12(-3.2,4.75) A4_B9(-2.4,4.75) B1_A12(3.2,4.75) B4_A9(2.4,4.75)
  rect 0.3x1.14 smd: A5(-1.25,4.75) A6(-0.25,4.75) A7(0.25,4.75) A8(1.25,4.75) B5(1.75,4.75) B6(0.75,4.75) B7(-0.75,4.75) B8(-1.75,4.75)
  oval 1.05x2.1 hole 0.6 slot 1.7 at 90 deg: SH1(-4.32,4.18) SH2(4.32,4.18)
  oval 0.9x1.8 hole 0.6 slot 1.4 at 90 deg: SH3(-4.32,0) SH4(4.32,0)
  round 0.65 hole 0.65 unplated: ""(-2.89,3.68) ""(2.89,3.68)
  silkscreen extent -4.47,-2.6 4.47,2.81, body extent -4.47,-2.6 4.47,5, height 3.28
"WE 691312510002" [mm] "PCB plug-in connector, male header, Pitch 5.08 mm, 2 poles, WR-TBL Series 312"
  round 3.5 hole 1.5: 1(-2.54,0) 2(2.54,0)
  silkscreen extent -5.5,-2.4 5.5,5, body extent -5.08,-2 5.08,10, height 8.51

## Part data
C1 C2 C3 C4 C5 C6 C7 C8 C9 C10 C11 C12 C13 C14 C15 C16 C17 C18 C19 C20 C21 C22 C23 C24 C25 C26 C27 C28 C29 C30 C31 C32 C33 C34 C35 C36 C37 C38 C39 C40 C41 C42 C43 C44 C47: library part Capacitor, "Capacitor"
D1 D2 D3 D4: library part DIODE, "Diode generic 2 leads"
J1 J2 J3 J7 J8: library part Header2, "PCB terminal block"
J4: library part "USB-C-SMD Amphenol 12402012E212A", "USB-C-SMD Amphenol 12402012E212A"
J6: library part "SD-MICRO MOLEX 47352-1001", "SD Card  Micro"
Q1: library part "MOS-N SOT23 S-D-G", "Generic MOS-N"
Q2: library part "MOS-P SOT23 G-S-D", "Generic MOS-P"
R1 R2 R3 R4 R5 R6 R7 R8 R9 R10 R11 R13 R14 R15 R16 R17 R18 R19 R20 R21 R22 R23 R24 R25 R26 R27 R28 R29 R30 R31 R32 R33 R34 R35 R36 R37 R38 R39 R40 R41 R42 R43 R44 R45 R46 R47 R48 R49 R50 R51 R52 R53 R54 R55 R56: library part Resistor, "Resistor"
R12: library part Trimmer, "Trimmer"
U1 U2 U3 U4 U5 U8 U9 U10 U11 U12 U13 U15: library part "OPA DUAL", "Generic dual OPA 8 pins"
U6: "6.5 V, 500 mA, Ultralow Noise, High PSRR, Fast Transient Response CMOS LDO", Package="LFCSP -8 Analog Devices", Check_prices=https://www.snapeda.com/parts/ADM7170ACPZ-3.3-R7/Analog+Devices/view-part/?ref=eda, MF="Analog Devices", MP=ADM7170ACPZ-3.3-R7, SnapEDA_Link=https://www.snapeda.com/parts/ADM7170ACPZ-3.3-R7/Analog+Devices/view-part/?ref=snap
X1: library part "Crystal C3.2x1.5 Abracon ABS07", "Crystal C3.2x1.5 Abracon ABS07"
X2: library part "Crystal C2.0x1.6 Kyocera CX2016DB", "Crystal C2.0x1.6 Kyocera CX2016DB"

## Via types
v1: diameter 0.5, hole 0.15, Top Layer to Bottom Layer, 91 vias

## Nets (pads, with @x,y where several pads share a name; then routed paths per layer and width w, separated by ;. In a path a pad name is that pad's centre, name@x,y a point inside that pad or via, vN(x,y) a via of type N, cw(c..) or ccw(c..) an arc to the next point about the centre after c; other vN are vias at no path point)
3v3: C17.1 C18.1 C19.1 C20.1 C21.1 C22.1 R26.2 U7.1 U7.13 U7.19 U7.32 U7.48 U7.64 | length 63.6
  Top Layer w0.25: v1(44.198,61.995) 46.87,61.995 47.02,61.845 R26.2 ; v1(54.598,68.245) 54.598,66.518 54.621,66.495 U7.1 55.748,66.495 56.748,67.495 ; U7.13 56.047,60.495 ; U7.64 56.748,67.495 ; U7.19 57.748,58.794 56.047,60.495 ; U7.32 64.248,57.609 64.173,57.684 64.173,57.771 63.698,58.246 63.698,65.196 ; C22.1 C17.1 ; C21.1 C18.1 ; C20.1 C19.1 C18.1 ; 56.047,60.495 59.047,63.495 59.047,65.196 ; 56.748,67.495 59.047,65.196 ; 59.047,65.196 63.698,65.196 ; 63.698,65.196 64.988,66.486 66.188,66.486 U7.48 67.648,66.495 C17.1 ; C17.1 C18.1
  Bottom Layer w0.25: v1(44.198,61.995) 50.448,68.245 v1(54.598,68.245)
CH1: U2.1 U2.2 U7.14 | length 45.5
  Top Layer w0.25: U2.1 U2.2 18.059,70.135 22.394,65.8 32,65.8 39.906,57.894 50.266,57.894 52.367,59.995 U7.14
CH2: R7.2 U3.1 U7.15 | length 45.4
  Top Layer w0.25: R7.2 U3.1 19.687,64.005 20.677,64.995 31.485,64.995 39.435,57.045 51.073,57.045 53.523,59.495 U7.15
CH3: R13.1 U5.7 U7.16 | length 44.5
  Top Layer w0.25: R13.1 U5.7 20.715,46.635 20.33,47.02 20.33,48.33 21.2,49.2 v1(30.2,49.2) ; v1(53.098,57.5) 53.146,57.548 53.146,57.894 54.248,58.995 U7.16
  Bottom Layer w0.25: v1(30.2,49.2) 44.798,49.2 v1(53.098,57.5)
CH4: R27.1 U7.8 U15.6 U15.7 | length 39.5
  Top Layer w0.25: v1(41.12,47.325) 41.425,47.02 R27.1 ; U15.6 U15.7 50.266,46.038 51.906,46.038 v1(51.923,46.02) ; v1(53.098,63.02) 53.114,63.005 54.788,63.005 U7.8
  Bottom Layer w0.25: v1(41.12,47.325) 50.618,47.325 v1(51.923,46.02) 51.923,51.729 56.398,56.204 56.398,61.845 55.248,62.995 53.123,62.995 v1(53.098,63.02)
CH5: U7.9 U9.1 U9.2 | length 33.9
  Top Layer w0.25: U9.1 U9.2 40.7,78.935 41.682,77.953 41.682,62.818 44.9,59.6 49.81,59.6 52.706,62.495 U7.9
CH6: R40.1 U7.10 U10.6 U10.7 | length 43.1
  Top Layer w0.25: v1(52.498,61.545) 52.948,61.995 U7.10 ; v1(61.748,46.08) R40.1 ; U10.6 U10.7 71.74,46.063 73.481,46.063 v1(73.498,46.045)
  Bottom Layer w0.25: v1(52.498,61.545) 52.498,63.163 52.881,63.545 55.264,63.545 61.748,57.062 v1(61.748,46.08) 73.463,46.08 v1(73.498,46.045)
CH7: U7.11 U11.1 U11.2 | length 47.9
  Top Layer w0.25: U11.2 U11.1 36.374,35.051 v1(41.695,40.371) ; v1(53.2,60.7) 53.986,61.486 54.788,61.486 U7.11
  Bottom Layer w0.25: v1(41.695,40.371) 39.6,42.466 39.6,47.654 40.746,48.8 45.141,48.8 55.248,58.908 55.248,60.754 55.102,60.9 53.4,60.9 v1(53.2,60.7)
DEBUG_SWCLK_JCLK: J5.6 U7.49 | length 29.4
  Top Layer w0.25: U7.49 64.248,68.995 77.87,82.618 v1(77.87,89.2)
  Bottom Layer w0.25: v1(77.87,89.2) J5.6
DEBUG_SWDIO_JTMS: J5.4 U7.46 | length 34.9
  Top Layer w0.25: U7.46 71.125,65.495 79.14,73.511 v1(79.14,88.9)
  Bottom Layer w0.25: v1(79.14,88.9) J5.4
DUT: J7.1 J8.2 U12.3 | length 21.7
  Top Layer w0.25: v1(8.9,37) 8.918,36.982 16.757,36.982 U12.3
  Bottom Layer w0.25: J7.1 5.25,49.15 5.25,41.35 J8.2 5.2,40.7 v1(8.9,37)
GATEn: R35.2 U7.24 | length 23.2
  Top Layer w0.25: v1(47.098,40.396) 47.123,40.371 R35.2 ; v1(59.898,52.945) 59.898,55.439 60.248,55.788 U7.24
  Bottom Layer w0.25: v1(47.098,40.396) 53.397,46.695 53.648,46.695 v1(59.898,52.945)
GATEp: R41.1 U7.25 | length 22.9
  Top Layer w0.25: v1(60.748,55.545) U7.25 ; v1(65.698,39.745) 65.746,39.793 69.296,39.793 R41.1
  Bottom Layer w0.25: v1(60.748,55.545) 60.748,44.596 v1@65.498,39.845
GND: C1.2 C2.2 C3.1 C4.1 C5.2 C6.2 C7.2 C8.1 C9.1 C10.1 C11.2 C12.2 C13.2 C14.1 C15.1 C16.1 C17.2 C18.2 C19.2 C20.2 C21.2 C22.2 C23.2 C24.2 C25.2 C26.2 C27.2 C28.2 C29.2 C30.2 C31.2 C32.2 C33.2 C34.2 C35.1 C36.1 C37.2 C38.2 C39.2 C40.1 C41.1 C42.1 C43.2 C44.1 C47.2 J1.1 J3.2 J4.A1_B12 J4.B1_A12 J4.SH1 J4.SH2 J4.SH3 J4.SH4 J5.5 J5.7 J5.11 J6.6 J8.1 Q1.1 R6.1 R8.1 R10.1 R17.2 R18.1 R20.2 R23.2 R25.1 R36.1 R39.1 R49.1 R50.1 R53.1 R55.1 U4.3 U7.12 U7.18 U7.31 U7.47 U7.63 U13.4 X2.2 X2.4 | length 9.3
  Top Layer w0.25: J4.B1_A12 90.625,61.171 91.084,61.171 93.3,63.387 93.3,65.005 91.084,67.221 90.625,67.221 J4.A1_B12
  other v1: 33.2,26.6 13.5,26.7 45.1,30.41 25.271,30.505 13.6,35.7 25.3,39.505 41.695,43.515 62.798,43.54 13.73,44 53.498,47.325 75.198,47.35 25.276,47.905 13.4,51.8 25.3,55.705 13.2,60.195 25.2,64 13.2,67.595 147.4,69.6 25,71.405 37,76.4 13.4,77.395 48.8,80.2 25.4,81.205 83.7,96.4
Imeas: R2.2 R29.2 R33.2 R37.2 R43.2 U1.7 U2.3 U3.5 U12.7 | length 153.5
  Top Layer w0.25: U2.3 10.365,68.865 ; R2.2 19.9,81.535 21.5,79.935 U1.7 28.265,79.935 28.7,79.5 ; U12.7 R29.2 24.875,38.81 v1(29.454,38.81) ; R37.2 36.435,79.5 28.7,79.5 ; R33.2 41.12,44.21 41.12,42.649 ; R43.2 55.133,37.145 46.623,37.145 41.12,42.649 ; 10.365,68.865 10.365,71.165 12.1,72.9 22.094,72.9 24.494,75.3 27.7,75.3 28.7,76.3 28.7,79.5 ; 10.365,68.865 8.5,67 8.5,59.655 9.555,58.6 20.005,58.6 21.6,60.195 U3.5 24.005,60.195 33,51.2 v1(33,38.764) 36.885,42.649 41.12,42.649
  Bottom Layer w0.25: v1(29.454,38.81) 29.477,38.787 32.977,38.787 v1(33,38.764)
In_LDO: C11.1 J2.1 U1.3 U6.5 U6.7 U6.8 | length 36.9
  Top Layer w0.25: v1(10.3,78.665) U1.3 ; v1(23,89) 23.5,89.5 U6.5 23.525,91.025 25.279,91.025 25.7,91.446 25.7,91.85 C11.1 U6.8 U6.7
  Bottom Layer w0.25: J2.1 7.245,78.665 v1(10.3,78.665) 20.635,89 v1(23,89)
NetC12_1: C12.1 J3.1 R11.2 U6.1 U6.2 | length 17.5
  Top Layer w0.25: v1(10.3,91.9) R11.2 18.571,92.371 18.571,92.771 C12.1 19.85,92.55 U6.1 U6.2
  Bottom Layer w0.25: J3.1 6.179,90.86 7.219,91.9 v1(10.3,91.9)
NetC13_1: C13.1 U6.4 | length 2
  Top Layer w0.25: C13.1 19.95,91.05 U6.4
NetC14_2: C14.2 U7.3 X1.1 | length 6
  Top Layer w0.25: X1.1 51.798,68.445 C14.2 52.371,67.872 52.371,67.27 54.137,65.505 54.788,65.505 U7.3
NetC15_2: C15.2 U7.4 X1.2 | length 10.8
  Top Layer w0.25: C15.2 47.198,68.845 X1.2 47.598,68.244 48.071,67.77 49.222,67.77 51.997,64.995 U7.4
NetC16_2: C16.2 U7.5 X2.3 | length 7.7
  Top Layer w0.25: X2.3 47.148,64.495 C16.2 U7.5
NetC23_1: C23.1 U7.6 X2.1 | length 11.8
  Top Layer w0.25: C23.1 45.648,63.495 X2.1 45.748,63.445 46.423,62.77 49.711,62.77 50.936,63.995 U7.6
NetC26_1: C26.1 U7.30 | length 3.1
  Top Layer w0.25: U7.30 63.257,57.036 63.257,56.236 64.248,55.245 C26.1
NetC27_1: C27.1 D2.1 Q1.2 U15.5 | length 14.2
  Top Layer w0.25: U15.5 U15.5@50.673,43.515 ; D2.1 54.073,47.971 54.073,46.915 U15.5@50.673,43.515 ; Q1.2 53.347,40.396 53.347,43.49 C27.1 U15.5@50.673,43.515
NetC28_1: C28.1 R33.1 U15.3 | length 6.7
  Top Layer w0.25: R33.1 U15.3 45.223,44.785 47.948,42.06 47.948,41.995 C28.1
NetC29_1: C29.1 R37.1 U9.3 | length 3.5
  Top Layer w0.25: R37.1 C29.1 38.017,77.683 40.257,77.683 U9.3
NetC30_1: C30.1 D4.2 Q2.3 U10.5 | length 15.7
  Top Layer w0.25: U10.5 U10.5@72.148,43.54 ; D4.2 75.773,48.07 75.773,46.98 74.133,45.34 73.947,45.34 U10.5@72.148,43.54 ; Q2.3 74.723,38.97 74.723,43.515 C30.1 U10.5@72.148,43.54
NetC31_1: C31.1 R43.1 U10.3 | length 7.4
  Top Layer w0.25: R43.1 U10.3 66.698,44.81 69.423,42.085 69.423,41.72 C31.1
NetC34_1: C34.1 R44.1 U11.3 | length 3.4
  Top Layer w0.25: C34.1 R44.1 U11.3
NetD1_1: D1.1 R32.2 U15.1 | length 6.1
  Top Layer w0.25: D1.1 44.383,48.921 45.303,48 ; U15.1@44.373,47.325 U15.1 45.13,47.325 45.303,47.499 45.303,48 ; R32.2 46.223,48.92 45.303,48
NetD1_2: D1.2 R27.2 U15.2 | length 6.6
  Top Layer w0.25: D1.2 40.363,47.339 41.682,46.02 R27.2 43.041,46.038 44.781,46.038 U15.2
NetD2_2: D2.2 R32.1 | length 2.8
  Top Layer w0.25: R32.1 49.723,48.92 D2.2
NetD3_1: D3.1 R40.2 U10.2 | length 5.9
  Top Layer w0.25: D3.1 62.381,47.163 62.716,47.163 R40.2 U10.2
NetD3_2: D3.2 R42.2 U10.1 | length 5.8
  Top Layer w0.25: D3.2 64.953,48.245 65.848,47.35 U10.1 66.698,47.35 67.437,48.09 67.743,48.09 R42.2
NetD4_1: D4.1 R42.1 | length 2.7
  Top Layer w0.25: R42.1 71.398,48.845 D4.1
NetJ4_A4_B9: J4.A4_B9 J4.B4_A9 R24.1 | length 12.7
  Top Layer w0.25: R24.1 88.4,61.175 89.131,61.906 90.34,61.906 J4.B4_A9 90.72,61.796 90.945,62.021 91.134,62.021 92.7,63.587 92.7,64.805 91.084,66.421 90.625,66.421 J4.A4_B9 J4.A4_B9@90.34,66.486
NetQ1_1: Q1.3 R35.1 | length 3
  Top Layer w0.25: R35.1 Q1.3
NetQ2_1: Q2.1 R41.2 | length 2.1
  Top Layer w0.25: R41.2 Q2.1
NetR1_1: R1.1 R3.2 U1.2 | length 3.8
  Top Layer w0.25: R1.1 14.225,80.38 14.225,80.11 R3.2 U1.2
NetR1_2: R1.2 R4.1 U1.1 | length 3.7
  Top Layer w0.25: R1.2 U1.1 16.554,81.284 R4.1
NetR2_1: R2.1 R4.2 U1.6 | length 7
  Top Layer w0.25: R4.2 R2.1 18.9,81.265 21.5,78.665 U1.6
NetR5_2: R5.2 R6.2 U1.5 | length 3.7
  Top Layer w0.25: U1.5 R5.2 R6.2
NetR7_1: R7.1 R8.2 U3.2 | length 4.2
  Top Layer w0.25: R7.1 13.571,63.534 13.571,63.264 R8.2 U3.2
NetR9_1: R9.1 R10.2 U3.6 | length 3.8
  Top Layer w0.25: U3.6 22.042,61.483 24.182,61.483 R10.2 24.671,61.971 24.671,62.206 R9.1
NetR9_2: R9.2 U3.3 U3.7 | length 8.2
  Top Layer w0.25: U3.3 20.33,61.465 21.6,62.735 U3.7 R9.2
NetR13_2: R13.2 R17.1 U5.6 | length 3.8
  Top Layer w0.25: U5.6 R17.1 24.451,45.54 24.451,45.81 R13.2
NetR14_1: R14.1 R21.2 U4.1 | length 20.5
  Top Layer w0.25: R14.1 U4.1 17.1,55.705 18.395,57 25.879,57 28.811,54.067 28.811,53.311 28.665,53.165 R21.2
NetR14_2: R14.2 R19.1 U4.2 | length 4
  Top Layer w0.25: R14.2 14.225,54.88 14.225,54.61 R19.1 U4.2
NetR15_1: R15.1 U4.7 U5.3 | length 21
  Top Layer w0.25: U5.3 13.44,45.365 12.6,46.205 12.6,48.7 14.4,50.5 17.765,50.5 21.7,54.435 U4.7 R15.1
NetR15_2: R15.2 R21.1 U4.6 | length 3.9
  Top Layer w0.25: U4.6 R21.1 24.771,53.636 24.771,53.906 R15.2
NetR16_1: R16.1 U5.1 U5.5 | length 9
  Top Layer w0.25: R16.1 U5.1 17.895,47.905 21.705,44.095 U5.5
NetR16_2: R16.2 R20.1 U5.2 | length 3.6
  Top Layer w0.25: R16.2 14.201,47.434 14.201,47.164 R20.1 U5.2
NetR22_1: R22.1 R23.1 U4.5 | length 3.5
  Top Layer w0.25: U4.5 R22.1 R23.1
NetR28_1: R28.1 R30.2 U12.2 | length 3.9
  Top Layer w0.25: R28.1 14.071,39.034 14.071,38.764 R30.2 U12.2
NetR28_2: R28.2 R31.1 U12.1 | length 24.3
  Top Layer w0.25: R28.2 U12.1 20.689,39.505 21.884,40.7 29.5,40.7 30.8,39.4 30.8,38.368 29.397,36.965 R31.1
NetR29_1: R29.1 R31.2 U12.6 | length 3.8
  Top Layer w0.25: U12.6 R31.2 24.829,37.494 24.829,37.764 R29.1
NetR34_2: R34.2 R36.2 U12.5 | length 3.4
  Top Layer w0.25: U12.5 R34.2 R36.2
NetR38_1: R38.1 U8.1 U8.2 | length 3.4
  Top Layer w0.25: R38.1 U8.1 U8.2
NetR38_2: R38.2 R39.2 U8.5 | length 12
  Top Layer w0.25: R39.2@13.557,29.249 R39.2 R38.2 14.146,31.08 17.426,31.08 21.54,26.966 21.54,26.868 21.714,26.695 U8.5
NetR45_1: R45.1 R47.2 R49.2 U13.6 | length 5.7
  Top Layer w0.25: U13.6 R49.2 146.929,66.393 146.929,66.629 R47.2 146.575,67.925 146.575,68.125 R45.1
NetR46_1: R46.1 R48.2 R50.2 U13.2 | length 5.2
  Top Layer w0.25: R48.2 136.125,68.875 136.125,68.58 R46.1 R50.2 136.317,67.117 138.457,67.117 U13.2
NetR51_1: R51.1 R53.2 R54.2 U13.5 | length 5.1
  Top Layer w0.25: U13.5 R54.2 R53.2 R51.1
NetR52_1: R52.1 R55.2 R56.2 U13.3 | length 4.7
  Top Layer w0.25: R52.1 R55.2 R56.2 U13.3
REG_LDO: R12.1 R12.2 R18.2 R19.2 R22.2 U6.6 | length 96.1
  Top Layer w0.25: R19.2 R18.2 12.1,54.465 12.1,56.1 13.7,57.7 25.744,57.7 30,53.444 30,53.3 ; U6.6 v1(25,91.55) ; R22.2 28.595,51.895 30,53.3 ; v1(30.8,52.5) 30,53.3
  Bottom Layer w0.25: v1(30.8,52.5) 30.8,76.547 25,82.347 v1(25,91.55) R12.2 37,86.55 R12.1
RESET: C25.1 J5.12 R26.1 U7.7 | length 45.2
  Top Layer w0.25: C25.1 R26.1 50.148,61.845 51.848,63.545 53.528,63.545 53.578,63.495 U7.7 56.248,63.495 v1(57.748,64.995)
  Bottom Layer w0.25: v1(57.748,64.995) 57.748,75.852 J5.12
SDMMC1_CLK: J6.5 U7.53 | length 41.4
  Top Layer w0.25: J6.5 60.085,99.135 60.085,99.774 59.159,100.7 55.695,100.7 54.885,99.89 54.885,87.937 62.248,80.574 U7.53
SDMMC1_CMD: J6.3 U7.54 | length 35.9
  Top Layer w0.25: J6.3 58.16,94.46 64.7,87.92 v1(64.7,86.4) ; v1(59.851,81.476) 61.748,79.579 U7.54
  Bottom Layer w0.25: v1(59.851,81.476) 64.7,86.324 v1(64.7,86.4)
SDMMC1_D0: J6.7 U7.39 | length 57.8
  Top Layer w0.25: v1(59.047,74.6) 59.047,78.453 54.3,83.2 54.3,99.87 55.63,101.2 60.859,101.2 62.285,99.774 62.285,99.135 J6.7 ; U7.39 68.299,61.995 v1(68.498,61.796)
  Bottom Layer w0.25: v1(59.047,74.6) 69.6,64.047 69.6,62.2 69.196,61.796 v1(68.498,61.796)
SDMMC1_D1: J6.8 U7.40 | length 57.6
  Top Layer w0.25: v1(58.4,73.3) 58.4,78.534 53.9,83.034 53.9,97 53.8,97.1 53.8,99.936 55.464,101.6 61.359,101.6 63.235,99.724 63.235,99.635 63.66,99.21 J6.8 ; U7.40 68.223,62.495 v1(68.498,62.77)
  Bottom Layer w0.25: v1@58.404,73.324 58.448,73.28 58.448,72.821 v1(68.498,62.77)
SDMMC1_D2: J6.1 U7.51 | length 33.4
  Top Layer w0.25: J6.1 55.96,90.929 63.248,83.641 U7.51
SDMMC1_D3: J6.2 U7.52 | length 37.9
  Top Layer w0.25: J6.2 57.06,99.954 56.914,100.1 55.661,100.1 55.285,99.724 55.285,88.102 62.748,80.64 U7.52
Sense: R11.1 R12.3 U6.3 | length 34.8
  Top Layer w0.25: v1(16.554,91.1) 18.3,91.1 R11.1 19.275,91.725 19.75,91.725 19.925,91.55 U6.3
  Bottom Layer w0.25: v1(16.554,91.1) 22.004,96.55 R12.3
Umeas: R44.2 U8.6 U8.7 | length 13
  Top Layer w0.25: U8.6 U8.7 v1(24.271,29.235) ; v1(28.7,27.8) 28.735,27.835 33.165,27.835 R44.2
  Bottom Layer w0.25: v1(24.271,29.235) 27.265,29.235 v1(28.7,27.8)
USART1_RX: J5.13 U7.43 | length 61.2
  Top Layer w0.25: U7.43 75.503,63.995 v1@75.698,63.8
  Bottom Layer w0.25: J5.13 76.955,97.6 84.954,97.6 85.1,97.454 85.1,73.127 v1(75.773,63.8)
USART1_TX: J5.14 U7.58 | length 29.3
  Top Layer w0.25: U7.58 59.748,79.429 v1(59.898,79.579)
  Bottom Layer w0.25: v1(59.898,79.579) 59.946,79.627 60.253,79.627 J5.14
USB_DM: J4.A7 J4.B7 U7.44 | length 26.9
  Top Layer w0.25: U7.44 78.126,64.495 78.675,63.946 J4.A7 90.87,63.946 90.945,64.021 91.134,64.021 91.295,64.182 91.295,64.71 91.084,64.921 90.475,64.921 J4.B7
USB_DP: J4.A6 J4.B6 U7.45 | length 30.4
  Top Layer w0.25: U7.45 78.191,64.995 78.841,64.346 88.141,64.346 v1(88.6,64.805) 88.959,64.446 J4.A6 ; J4.B6 91.646,63.446 v1(92,63.8)
  Bottom Layer w0.25: v1(88.6,64.805) 90.995,64.805 v1(92,63.8)
USB_VBUS: R24.2 R25.2 U7.42 | length 24.7
  Top Layer w0.25: U7.42 74.345,63.495 79.641,58.2 R24.2 R25.2
Vb1: C47.1 U13.8 | length 3
  Top Layer w0.25: U13.8 144.349,68.405 145.544,69.6 v1(146.4,69.6)
Vb2: R51.2
Vb3: R45.2 R52.2 | length 20.6
  Top Layer w0.25: R52.2 135.393,63.207 135.393,62.807 135.9,62.3 137.932,62.3 141.113,65.481 141.113,66.919 144.593,70.4 147.545,70.4 148.7,69.245 148.7,68.875 148.125,68.3 R45.2
Vb4: R46.2
Vbat: J1.2 J2.2 J7.2 R3.1 R5.1 R30.1 R34.1 U8.3 | length 123.6
  Top Layer w0.25: v1(4.5,71.7) 4.5,74.2 ; J1.2 J1.2@5.4,67.679 ; R3.1 v1(9.555,79.935) 3.435,79.935 2.7,79.2 2.7,76 4.5,74.2 ; R30.1 13.555,38.28 8.945,38.28 v1(8.9,38.326) 8.2,37.626 8.2,35.646 10.021,33.825 ; U8.3 12.2,27.965 10.021,30.144 10.021,33.825 ; R34.1 25.904,35.12 25.904,34.03 25.699,33.825 10.021,33.825 ; R5.1 22.205,74.2 4.5,74.2
  Bottom Layer w0.25: v1(4.5,71.7) 4.5,68.579 5.4,67.679 J1.2 3.375,64.775 3.375,56.205 J7.2 5.3,52.064 8.9,48.464 v1(8.9,38.326) ; J2.2 7.365,79.935 v1(9.555,79.935)
VCC: C1.1 C2.1 C5.1 C6.1 C7.1 C32.1 C33.1 C37.1 C38.1 C39.1 C43.1 Q2.2 U1.8 U2.8 U3.8 U4.8 U5.8 U8.8 U9.8 U10.8 U11.8 U12.8 U15.8 | length 24.3
  Top Layer w0.25: U2.8 v1(24,71.405) ; U1.8 v1(24.4,81.205) ; U3.8 22.028,64.003 24.198,64.003 v1(24.2,64) ; U8.8 v1(24.271,30.505) ; U4.8 v1(24.3,55.705) ; U5.8 v1(24.276,47.905) ; U12.8 v1(24.3,39.505) ; U11.8 v1(44.1,30.41) ; U9.8 45.727,80.203 47.797,80.203 v1(47.8,80.2) ; U15.8 v1(52.498,47.325) ; U10.8 v1(74.198,47.35)
VDD: C24.1 J5.3 J6.4 | length 29.7
  Top Layer w0.25: J6.4 59.535,98.785 59.535,98.146 60.321,97.361 81.739,97.361 v1(82.7,96.4)
  Bottom Layer w0.25: J5.3 82.075,96.369 82.669,96.369 v1(82.7,96.4)
VEE: C3.2 C4.2 C8.2 C9.2 C10.2 C35.2 C36.2 C40.2 C41.2 C42.2 C44.2 U1.4 U2.4 U3.4 U4.4 U5.4 U8.4 U9.4 U10.4 U11.4 U12.4 U15.4 | length 24.4
  Top Layer w0.25: v1(14.2,60.195) U3.4 ; v1(14.2,67.595) U2.4 ; v1(14.4,51.8) 14.447,51.848 16.627,51.848 U4.4 ; v1(14.4,77.395) U1.4 ; v1(14.53,26.7) 14.533,26.698 16.672,26.698 U8.4 ; v1(14.6,35.7) 14.602,35.697 16.772,35.697 U12.4 ; v1(14.73,44) 14.777,44.047 16.632,44.047 U5.4 ; v1(34.2,26.6) U11.4 ; v1(38,76.4) 38.002,76.398 40.272,76.398 U9.4 ; v1(42.695,43.515) U15.4 ; v1(63.798,43.54) U10.4
Vout1: R48.1 U13.1 | length 3
  Top Layer w0.25: R48.1 137.632,69.7 138.457,68.875 138.457,68.422 U13.1
Vout2: R47.1 U13.7 | length 2.5
  Top Layer w0.25: U13.7 143.942,67.117 146.383,67.117 R47.1
Vref: R54.1 R56.1 | length 27.7
  Top Layer w0.25: R56.1 133.7,67.465 133.7,69.9 134.7,70.9 148.7,70.9 149.6,70 149.6,66.795 R54.1
pads on no net: J4. J4.A5 J4.A8 J4.B5 J4.B8 J5.1 J5.2 J5.8 J5.9 J5.10 J6.0 J6.9 U2.5 U2.6 U2.7 U6.0 U7.2 U7.17 U7.20 U7.21 U7.22 U7.23 U7.26 U7.27 U7.28 U7.29 U7.33 U7.34 U7.35 U7.36 U7.37 U7.38 U7.41 U7.50 U7.55 U7.56 U7.57 U7.59 U7.60 U7.61 U7.62 U9.5 U9.6 U9.7 U11.5 U11.6 U11.7

## Polygon pours and split planes (outlines as drawn)
no net on Internal Plane 1 (split plane): 244.848,0.252 0.252,0.252 0.252,203.348 244.848,203.348
no net on Internal Plane 2 (split plane): 244.848,0.252 0.252,0.252 0.252,203.348 244.848,203.348

## Silkscreen, mask and mechanical layers (free items; w line width, h text height)
Top Overlay:
  text ".Pcb_File_Name_No_Path" at 5,15 h3
  text ".PcbDate" at 5,10 h3
  text "Ver .PcbRevision" at 40,10 h3
  text ".PcbDesigner" at 5,5 h3
Mechanical 1:
  the board outline again, w0.15